# Altium PCB voltageBooster_test.PcbDoc
Units mm, origin at the board's own origin, x right, y up, seen from the top; angles counter-clockwise.
Board outline 29.46 x 49.02 mm, 2 copper layers (Top Layer, Bottom Layer); 32 components, 48 nets, 108 pads, 17 vias.
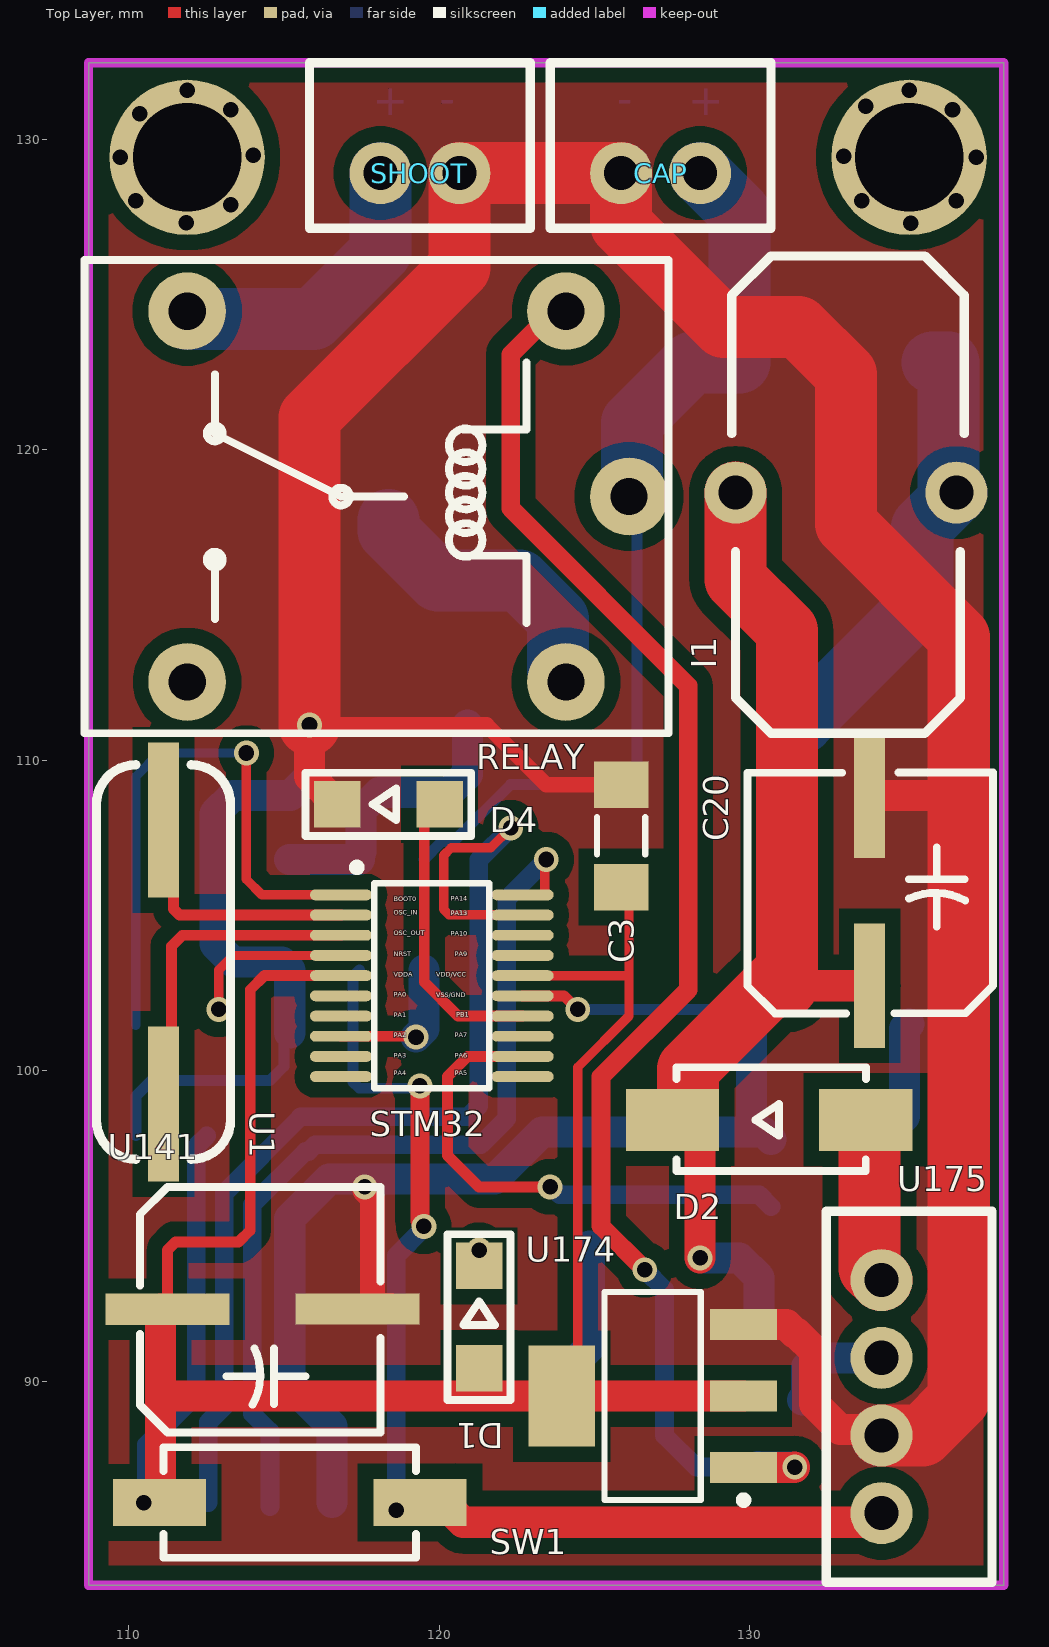
[diagram p0: Top Layer view]
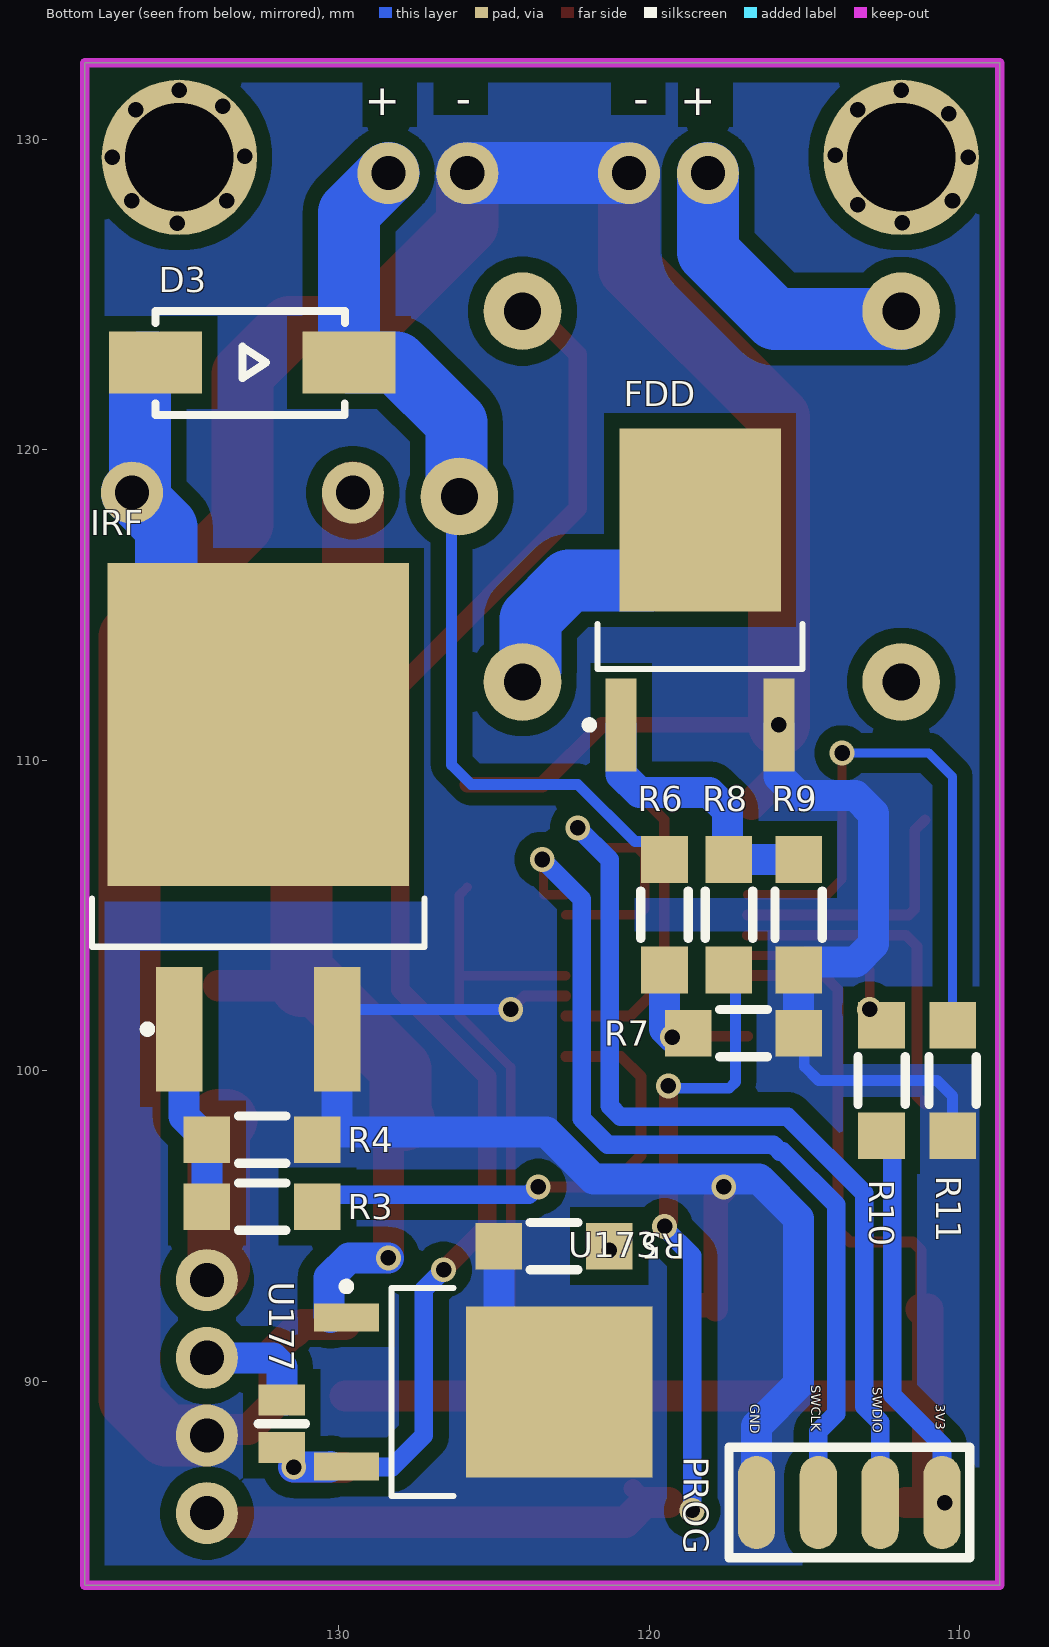
[diagram p1: Bottom Layer view, seen from below]
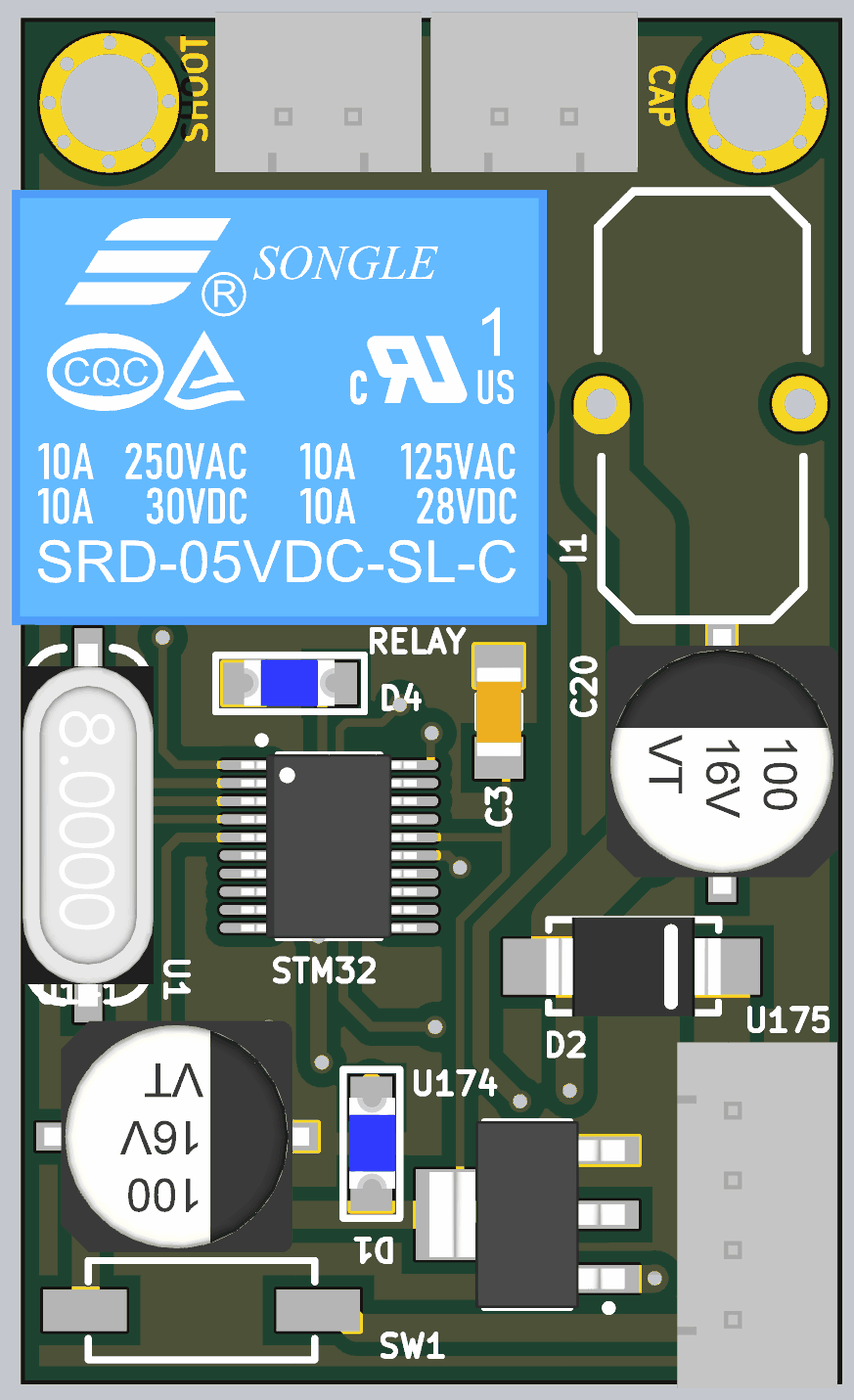
[diagram p2: 3D render of the assembled board from above, using the file's embedded part models]
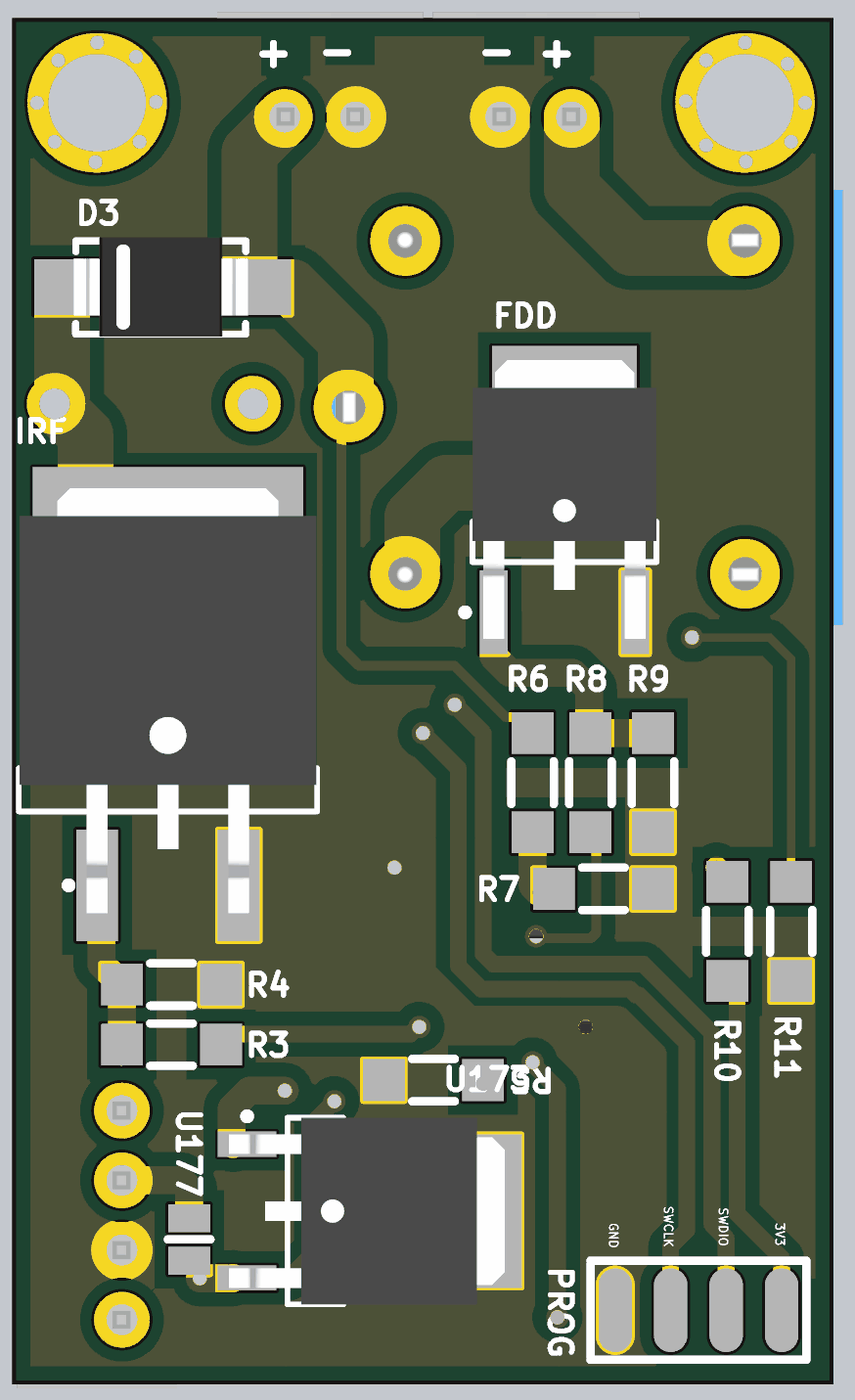
[diagram p3: 3D render of the assembled board from below, using the file's embedded part models]

## Layer stack, top to bottom
Top Solder: solder mask 0.0102, Solder Resist, Dk 3.5
Top Layer: signal copper 0.0356
Dielectric 1: dielectric 0.32, FR-4, Dk 4.8
Bottom Layer: signal copper 0.0356
Bottom Solder: solder mask 0.0102, Solder Resist, Dk 3.5

## Board outline
108.712,83.439 108.712,132.461 138.176,132.461 138.176,83.439

## Design rules (kind name [scope] priority, off if disabled: settings)
Clearance [All] p1: gap=0.3 ignorepadtopadclearanceinfootprint=FALSE except(0.5: Arc-Fill Arc-Poly Arc-Region Track-Fill Track-Poly Track-Region SMDPad-Fill SMDPad-Poly SMDPad-Region THPad-Fill THPad-Poly THPad-Region Via-Fill Via-Poly Via-Region Fill-Fill Fill-Poly Fill-Region Poly-Poly Poly-Region Region-Region)
ComponentClearance [All] p1 off: gap=0.254 collisioncheckmode=3 verticalgap=0.254 showdistances=FALSE
Height [All] p1 off: minheight=0 maxheight=25.4 prefheight=12.7
PlaneConnect [All] p1: planeconnectstyle=Direct reliefexpansion=0.508 reliefentries=4 reliefconductorwidth=0.254 reliefairgap=0.254
PolygonConnect [All] p1: connectstyle=Direct reliefconductorwidth=0.8 reliefentries=4 polygonreliefangle="90 Angle" airgapwidth=0.3
RoutingVias [All] p1: holewidth=0.5 width=0.8 viastyle="Through Hole" minholewidth=0.5 minwidth=0.6 maxholewidth=10 maxwidth=10
SolderMaskExpansion [All] p1: expansion=0.102 istentingtop=FALSE
Width [All] p1: maxlimit=10 minlimit=0.3 preferedwidth=0.3
27 further rules are at their usual default settings.

## Components (designator, comment, footprint, x,y, rotation, side; value= is the part's Value field where it differs from the comment)
C3 "Comment" CAP1206 125.857,107.569 r90 top
C20 "Comment" "CAP SMD 100uF 16V" 133.858,105.791 r90 top
CAP "Comment" "XH 2pin" 127.127,129.794 r0 top
D1 "Comment" "LED BLUE 1206" 121.285,92.075 r90 top
D2 "Comment" Diode 130.683,98.425 r180 top
D3 "Comment" Diode 132.842,122.809 r180 bottom
D4 "Comment" "LED BLUE 1206" 118.364,108.585 r180 top
FDD "Comment" FDD6690A 118.364,115.189 r90 bottom
I1 "Comment" inductor 133.096,118.745 r0 top
IRF "Comment" IRF540S 132.588,107.996 r90 bottom
PROG "Comment" PROGRAMER 113.623,86.106 r0 bottom
R3 "Comment" RES1206 132.461,95.631 r180 bottom
R4 "Comment" RES1206 132.461,97.787 r180 bottom
R5 "Comment" RES1206 123.063,94.361 r0 bottom
R6 "Comment" RES1206 119.507,105.029 r90 bottom
R7 "Comment" RES1206 116.967,101.219 r180 bottom
R8 "Comment" RES1206 117.434,105.029 r270 bottom
R9 "Comment" RES1206 115.189,105.029 r270 bottom
R10 "Comment" RES1206 112.522,99.695 r270 bottom
R11 "Comment" RES1206 110.235,99.695 r270 bottom
RELAY "Comment" "Relay 5V 10A" 117.983,118.491 r0 top
SHOOT "Comment" "XH 2pin" 119.38,129.794 r0 top
STM32 "Comment" STM32F030F4P6 119.761,102.743 r0 top
SW1 "Comment" pushbutton 115.189,86.106 r180 top
U1 "Comment" "Crystal Oscilator" 111.125,103.505 r270 top
U141 "Comment" "CAP SMD 100uF 16V" 114.3,92.329 r0 top
U173 "Comment" "7805 (SOT-252)" 125.349,89.662 r180 bottom
U174 "Comment" AMS1117 126.873,89.535 r180 top
U175 "Comment" "XH 4PIN" 135.128,89.512 r270 top
U177 "Comment" Jumper 131.826,88.646 r90 bottom
? "Comment" SCREW 135.128,129.413 r270 top
? "Comment" SCREW 111.887,129.413 r0 top

## Footprints (in the part's own frame and the unit in brackets; to place one, negate y for a bottom-side part, rotate by r counter-clockwise, add the part's x,y. Pads: shape width x height; smd on the part's side, far side on the other; paste and mask are expansions set on the pad)
"7805 (SOT-252)" [mm] "D-PAK, 3-Pads, Body 6.25x6.71mm (max), IPC Medium Density"
  rect 2.1x0.9 smd: 1(-4.4,2.4) 3(-4.4,-2.4)
  rect 6x5.5 smd: 4(2.45,0)
  silkscreen extent -4.52,-3.35 -0.95,3.52, body extent -5.06,-3.35 4.85,3.35, height 2.45
AMS1117 [mm] "SOT223, 4-Leads, Body 6.30x7.00mm (avg), Pitch 2.30mm, IPC Medium Density"
  rect 2.15x1 smd: 1(-2.925,2.3) 2(-2.925,0) 3(-2.925,-2.3)
  rect 2.15x3.25 smd: 4(2.925,0)
  silkscreen extent -3.05,-3.35 1.55,3.47, body extent -3.5,-3.35 3.5,3.35, height 1.65
CAP1206 [mm] "Chip Capacitor, 2-Leads, Body 3.20x1.60mm, IPC Medium Density"
  rect 1.5x1.75 smd: 1(-1.651,0) 2(1.651,0)
  silkscreen extent -0.6,-0.77 0.6,0.77, body extent -1.6,-0.8 1.6,0.8, height 1
"CAP SMD 100uF 16V" [mm]
  rect 4x1 smd: 1(-3.048,0) 2(3.07,0.003)
  silkscreen extent -3.94,-3.97 3.81,3.94, body extent -4.75,-4.15 4.75,4.15, height 10.51
"Crystal Oscilator" [mm]
  rect 5x1 smd: 1(-4.572,0) 2(4.572,0)
  silkscreen extent -6.35,-2.16 6.35,2.16, body extent -6.5,-2.35 6.5,2.35, height 4.21
Diode [mm]
  rect 3x2 smd: 1(-3.048,0) 2(3.175,0)
  silkscreen extent -3.06,-1.69 3.05,1.65, body extent -3.12,-1.78 3.12,1.78, height 2.26
FDD6690A [mm] "D-PAK, 3-Pads, Body 5.85x6.66mm (max), IPC Medium Density"
  rect 3x1 smd: 1(-4.05,2.54) 3(-4.05,-2.54)
  rect 5.9x5.2 smd: 4(2.55,0)
  silkscreen extent -4.17,-3.3 -0.8,3.69, body extent -5,-3.3 5,3.3, height 3.03
inductor [mm]
  round 2 hole 1.1: 1(-3.556,-0.127) 2(3.556,-0.127)
  silkscreen extent -3.68,-7.87 3.81,7.49, body extent -4.15,-8.42 4.15,8.17, height 16.29
IRF540S [mm] "D2-PAK, 3-Pads, Body 7.93x8.70mm (max), IPC Medium Density"
  rect 4x1.5 smd: 1(-6.65,2.54) 3(-6.65,-2.54)
  rect 10.4x9.7 smd: 4(3.15,0)
  silkscreen extent -6.77,-5.35 -2.45,5.35, body extent -7.65,-5.33 7.6,5.33, height 5.08
Jumper [mm]
  rect 1x1.5 smd: 1(-0.762,0) 2(0.762,0)
  silkscreen extent 0,-0.76 0,0.76
"LED BLUE 1206" [mm]
  rect 1.5x1.5 smd: 1(-1.651,0) 2(1.651,0)
  silkscreen extent -2.67,-1.02 2.67,1.02, body extent -1.61,-0.85 1.66,0.8, height 0.9
PROGRAMER [mm]
  oval 1.2x3 smd: 1(-3.048,0) 2(-1.058,0) 3(0.931,0) 4(2.921,0)
  silkscreen extent -3.94,-1.78 3.81,1.78
pushbutton [mm]
  rect 3x1.5 smd: 1(-4.191,0) 2(4.191,0)
  silkscreen extent -4.06,-1.78 4.06,1.78, body extent -4.17,-1.82 4.17,1.82, height 4.25
"Relay 5V 10A" [mm]
  round 2.5 hole 1.2: 1(-6.096,5.969) 2(-6.096,-5.969) 3(6.096,-5.969) 4(6.096,5.969) 5(8.128,0)
  silkscreen extent -9.4,-7.62 9.4,7.62, body extent -9.6,-7.8 9.6,7.8, height 15.9
RES1206 [mm]
  rect 1.5x1.5 smd: 1(-1.778,0) 2(1.778,0)
  silkscreen extent -0.76,-0.76 0.76,0.76, body extent -1.58,-0.82 1.58,0.82, height 0.53
SCREW [mm]
  round 5 hole 3.5: 1(0,0)
  round 0 hole 0.5: ""(-2.159,0) ""(-1.651,-1.397) ""(-1.524,1.397) ""(-0.031,-2.11) ""(0,2.159) ""(1.397,1.524) ""(1.397,-1.524) ""(2.128,0.059)
STM32F030F4P6 [mm] "TSOP, 20-Leads, Body 6.50x4.40mm, Pitch 0.65mm, IPC Medium Density"
  oval 2x0.35 smd: 1(-2.925,2.925) 2(-2.925,2.275) 3(-2.925,1.625) 4(-2.925,0.975) 5(-2.925,0.325) 6(-2.925,-0.325) 7(-2.925,-0.975) 8(-2.925,-1.625) 9(-2.925,-2.275) 10(-2.925,-2.925) 11(2.925,-2.925) 12(2.925,-2.275) 13(2.925,-1.625) 14(2.925,-0.975) 15(2.925,-0.325) 16(2.925,0.325) 17(2.925,0.975) 18(2.925,1.625) 19(2.925,2.275) 20(2.925,2.925)
  silkscreen extent -2.54,-3.3 1.85,3.93, body extent -3.15,-3.3 3.15,3.3, height 1.2
"XH 2pin" [mm]
  round 2 hole 1.1: 1(-1.27,-0.889) 2(1.27,-0.889)
  silkscreen extent -3.56,-2.67 3.56,2.67, body extent -3.7,-2.88 3.7,2.88, height 7
"XH 4PIN" [mm]
  round 2 hole 1.1: 1(-3.753,-0.889) 2(-1.253,-0.889) 3(1.247,-0.889) 4(3.747,-0.889)
  silkscreen extent -5.97,-2.67 5.97,2.67, body extent -6.2,-2.88 6.2,2.88, height 7

## Via types
v1: diameter 0.8, hole 0.5, Top Layer to Bottom Layer, tented both sides, 17 vias

## Nets (pads, with @x,y where several pads share a name; then routed paths per layer and width w, separated by ;. In a path a pad name is that pad's centre, name@x,y a point inside that pad or via, vN(x,y) a via of type N, cw(c..) or ccw(c..) an arc to the next point about the centre after c; other vN are vias at no path point)
5V: RELAY.4 U173.3 U174.1 U177.1 | length 47.8
  Top Layer w0.6: RELAY.4 123.698,124.46 122.301,123.063 122.301,118.11 128.016,112.395 128.016,102.616 125.21,99.81 125.21,95.008 v1(126.619,93.599)
  Top Layer w1: U174.1 131.431,87.235 v1(131.445,87.249)
  Bottom Layer w0.6: v1(126.619,93.599) 127.254,92.964 127.254,88.265 128.27,87.249 130.244,87.249 U173.3@130.257,87.262
  Bottom Layer w1: U173.3@130.257,87.262 130.27,87.249 v1(131.445,87.249)
5Vin: U175.2 U177.2 | length 3.7
  Bottom Layer w1: U177.2@131.699,89.408 131.826,89.535 131.826,90.472 132.119,90.765 U175.2
12V: C20.1 D2.2 I1.1 U173.1 | length 34
  Top Layer w1: D2.2 127.897,98.425 128.397,97.925 v1(128.397,93.98) ; 131.191,102.743 C20.1
  Top Layer w2: D2.2@127.897,98.425 128.008,98.425 128.008,100.068 131.191,103.251 ; I1.1 129.54,115.824 131.191,114.173 131.191,102.743
  Bottom Layer w1: v1(128.397,93.98) 129.667,93.98 130.302,93.345 130.302,92.107 U173.1@130.257,92.062
BOOST_CTRL: R3.2 STM32.12 | length 16.3
  Top Layer w0.35: STM32.12 120.915,100.468 120.269,99.822 120.269,97.282 121.285,96.266 v1(123.571,96.266)
  Bottom Layer w0.6: v1(123.571,96.266) 123.625,96.266 123.879,96.012 130.302,96.012 R3.2
BOOST_FB: R6.1 R7.1 STM32.8 | length 4.7
  Top Layer w0.35: STM32.8 119.227,101.118 v1(119.253,101.092)
  Bottom Layer w1: v1(119.253,101.092) 119.507,101.346 R6.1
BOOT0: R11.1 STM32.1 | length 19.2
  Top Layer w0.3: v1(113.792,110.236) 113.792,106.172 114.296,105.668 STM32.1
  Bottom Layer w0.3: R11.1 110.235,109.473 110.998,110.236 v1(113.792,110.236)
BTEN: 
DIR: 
DIR1: 
DIR2: 
FDD_CTRL: FDD.1 R8.1 R9.1 | length 9.3
  Bottom Layer w1: R9.1 R8.1 117.434,107.009 117.482,107.057 117.482,108.38 118.067,108.966 120.318,108.966 120.904,109.552 FDD.1
GND: C3.2 C20.2 CAP.1 D4.2 FDD.3 IRF.3 PROG.4 R4.2 R5.2 R7.2 R9.2 R11.2 SHOOT.2 STM32.15 U141.2 U173.4 U174.3 U175.3 | length 171.8
  Top Layer w0.35: STM32.15 124.023,102.418 v1(124.46,101.981)
  Top Layer w0.5: v1(115.824,111.139) 121.525,111.139 123.444,109.22 C3.2
  Top Layer w0.8: v1(117.602,96.266) 117.602,96.144 117.856,95.89 U141.2@117.856,92.332 ; U141.2@117.856,92.459 U141.2@118.449,92.459
  Top Layer w1: v1(115.824,111.139) 115.824,109.474 D4.2 ; U174.3 131.177,91.835 131.445,91.567 131.494,91.567 132.08,90.981 132.08,89.281 132.905,88.456 134.048,88.456 U175.3 ; C20.2@133.855,109.22 C20.2 136.621,108.861 136.726,108.966
  Top Layer w2: v1(115.824,111.139) 115.824,121.031 120.65,125.857 SHOOT.2 CAP.1 125.857,127.254 129.159,123.952 131.572,123.952 133.096,122.428 133.096,117.602 136.726,113.972 136.726,108.966 136.726,89.437 135.554,88.265 U175.3
  Bottom Layer w0.35: R11.2 110.235,99.192 110.738,99.695 114.554,99.695 115.008,100.149 115.008,101.038 R7.2 ; v1(124.46,101.981) 129.473,101.981 130.048,101.406 IRF.3
  Bottom Layer w1: R7.2 R9.2 114.939,103.501 113.362,103.501 112.776,104.087 112.776,108.279 113.362,108.865 115.215,108.865 115.824,109.474 v1(115.824,111.139) ; PROG.4 116.544,88.265 116.544,88.561 115.189,89.916 115.189,95.25 116.459,96.52 121.793,96.52 123.31,98.037 R4.2@130.048,98.037 ; U173.4@123.407,89.662 124.841,91.096 R5.2 ; IRF.3 R4.2@130.048,98.037 ; R4.2 130.433,98.037 R4.2@130.048,98.037
  Bottom Layer w2: SHOOT.2 CAP.1
IRF_CTRL: IRF.1 R3.1 R4.1 | length 6.5
  Bottom Layer w1: R3.1@134.239,95.377 R4.1 134.979,98.528 134.979,101.363 IRF.1@135.128,101.511
LED1: D1.2 R5.1
  other v1: 121.285,94.234
LED2: 
LED3: 
LED_B: 
LED_G: D4.1 STM32.14 | length 9.6
  Top Layer w0.35: D4.1 119.517,108.087 119.517,102.86 120.609,101.768 STM32.14
LED_R: STM32.13
M1: 
M1_A: 
M1_B: 
M2: 
M2_A: 
M2_B: 
M3: 
M4: 
NET1: D3.1 I1.2 IRF.4 | length 14.2
  Bottom Layer w2: IRF.4@131.699,111.227 135.549,115.077 135.549,117.515 I1.2 136.39,118.88 136.39,122.809 D3.1
OSC_IN: STM32.2 U1.1 | length 8.5
  Top Layer w0.35: U1.1 111.45,107.752 111.45,105.212 111.644,105.018 STM32.2
OSC_OUT: STM32.3 U1.2 | length 10.8
  Top Layer w0.35: U1.2 111.379,99.187 111.379,104.013 111.734,104.368 STM32.3
POT_1: STM32.9
POT_2: STM32.10
PWM: 
PWM1: 
PWM2: 
RELAY_CTRL: FDD.4 RELAY.3 | length 9.1
  Bottom Layer w2: FDD.4 118.364,117.389 119.964,115.789 122.59,115.789 123.825,114.554 123.825,112.911 124.079,112.657 RELAY.3
RST: R10.1 STM32.4 | length 5.4
  Top Layer w0.3: v1(112.903,101.981) 112.903,103.251 113.37,103.718 STM32.4
RX: STM32.18
SHOOT_BTN: 
SHOOT_CTRL: R8.2 SW1.1 U175.4 | length 35.9
  Top Layer w0.6: v1@119.38,99.466 119.38,95.177 119.507,95.05 v1(119.507,94.996) ; SW1.1@120.073,86.106 SW1.1@120.523,86.556
  Top Layer w1: SW1.1 120.073,86.106 120.13,86.106 120.765,85.471 133.674,85.471 133.968,85.765 U175.4
  Bottom Layer w0.35: R8.2 117.221,103.038 117.221,99.646 117.426,99.441 119.301,99.441 v1(119.38,99.52)
  Bottom Layer w0.6: v1(118.618,85.852) 118.618,94.053 119.507,94.942 v1(119.507,94.996)
SOLENOID: RELAY.1 SHOOT.1 | length 9.7
  Bottom Layer w2: RELAY.1@111.887,124.206 115.951,124.206 118.11,126.365 SHOOT.1
SWCLK: PROG.3 STM32.20 | length 30
  Top Layer w0.3: STM32.20 123.379,105.668 123.403,105.691 123.403,106.766 v1(123.444,106.807)
  Bottom Layer w0.6: PROG.3@114.554,85.979 114.554,88.392 113.976,88.97 113.976,95.688 115.697,97.409 115.792,97.409 116.003,97.62 121.337,97.62 122.174,98.457 122.174,105.537 v1(123.444,106.807)
SWDIO: PROG.2 STM32.19 | length 35.8
  Top Layer w0.3: v1(122.301,107.823) 121.662,107.184 120.392,107.184 120.142,106.934 120.142,105.203 120.318,105.028 122.676,105.028 STM32.19
  Bottom Layer w0.6: PROG.2 112.564,88.686 113.076,89.197 113.076,96.061 115.535,98.52 120.923,98.52 121.274,98.871 121.274,106.796 v1(122.301,107.823)
TX: STM32.17
VBOOST: CAP.2 D3.2 R6.2 RELAY.5 | length 30.2
  Bottom Layer w0.35: R6.2 120.082,107.382 120.463,107.382 122.301,109.22 125.73,109.22 126.365,109.855 126.365,118.237 RELAY.5
  Bottom Layer w2: RELAY.5 126.207,118.587 126.207,120.873 128.143,122.809 D3.2 129.667,127.635 CAP.2
VCC: C3.1 D1.1 PROG.1 R10.2 STM32.5 STM32.16 SW1.2 U141.1 U174.2 U174.4 | length 75.6
  Top Layer w0.3: STM32.16 126.111,103.068 ; U174.4 124.46,90.047 124.46,100.121 126.111,101.772 126.111,103.068 ; C3.1 126.111,105.664 126.111,103.068
  Top Layer w0.35: U141.1@111.252,92.71 111.252,94.234 111.506,94.488 113.538,94.488 113.919,94.869 113.919,102.616 114.371,103.068 STM32.5
  Top Layer w1: SW1.2@110.873,86.231 110.748,86.106 v1(110.49,86.106) 110.783,86.106 111.033,86.356 111.033,89.662 ; SW1.2 SW1.2@111.748,86.106 ; U141.1 111.033,92.329 111.033,89.662 ; U174.2 U174.4 111.16,89.535 111.033,89.662
  Bottom Layer w0.6: PROG.1 110.575,87.969 112.176,89.57 112.176,97.571 R10.2
VIN: D2.1 U175.1 | length 5.6
  Top Layer w2: D2.1@133.604,98.425 133.858,98.425 133.858,93.646 U175.1
VINSW: 
pads on no net: ?. ?.1 RELAY.2 STM32.6 STM32.7 STM32.11

## Polygon pours and split planes (outlines as drawn)
GND on Bottom Layer "GND_L02_P001" (solid, pour order 1): 108.712,83.947 108.712,132.461 138.176,132.461 138.176,83.947
GND on Top Layer "GND_L01_P000" (solid, pour order 0): 108.712,83.947 108.712,132.461 138.176,132.461 138.176,83.947

## Keep-outs
Keep-Out Layer:
  the board outline again, w0.3

## Other copper
Bottom Layer:
  text "-" at 120.015,130.818 h1
  text "-" at 125.73,130.818 h1
  text "+" at 117.856,130.77 h1
  text "+" at 128.016,130.77 h1

## Silkscreen, mask and mechanical layers (free items; w line width, h text height)
Bottom Overlay:
  text "-" at 120.015,130.818 h1
  text "-" at 125.73,130.818 h1
  text "+" at 117.856,130.77 h1
  text "+" at 128.016,130.77 h1
Top Solder:
  the board outline again, w0.3
Bottom Solder:
  the board outline again, w0.3
  text "-" at 120.015,130.818 h1
  text "-" at 125.73,130.818 h1
  text "+" at 117.856,130.77 h1
  text "+" at 128.016,130.77 h1
Mechanical 1:
  the board outline again, w0.3

## Text inside footprints (layer, text, board x,y; h text height)
PROG: Bottom Overlay "SWCLK" at 114.779,89.875 h0.3 r90; Bottom Overlay "3V3" at 110.779,89.275 h0.3 r90; Bottom Overlay "SWDIO" at 112.811,89.825 h0.3 r90; Bottom Overlay "GND" at 116.746,89.275 h0.3 r90
STM32: Top Overlay "PA5" at 120.501,99.862 h0.15; Top Overlay "PA6" at 120.501,100.432 h0.15; Top Overlay "PA7" at 120.501,101.085 h0.15; Top Overlay "PB1" at 120.551,101.738 h0.15; Top Overlay "VSS/GND" at 119.901,102.373 h0.15; Top Overlay "PA9" at 120.501,103.698 h0.15; Top Overlay "PA10" at 120.376,104.351 h0.15; Top Overlay "PA13" at 120.376,105.005 h0.15; Top Overlay "PA14" at 120.376,105.477 h0.15; Top Overlay "PA4" at 118.531,99.862 h0.15; Top Overlay "PA3" at 118.536,100.424 h0.15; Top Overlay "PA2" at 118.536,101.077 h0.15; Top Overlay "PA1" at 118.536,101.73 h0.15; Top Overlay "PA0" at 118.536,102.383 h0.15; Top Overlay "VDDA" at 118.536,103.036 h0.15; Top Overlay "NRST" at 118.536,103.689 h0.15; Top Overlay "OSC_OUT" at 118.536,104.368 h0.15; Top Overlay "OSC_IN" at 118.536,105.021 h0.15; Top Overlay "VDD/VCC" at 119.901,103.025 h0.15; Top Overlay "BOOT0" at 118.536,105.469 h0.15